# Altium PCB StatusLEDSchem.PcbDoc
Units mil, origin at the board's own origin, x right, y up, seen from the top; angles counter-clockwise.
Board outline 3375 x 1400 mil, 2 copper layers (Top Layer, Bottom Layer); 11 components, 11 nets, 39 pads, 6 vias.
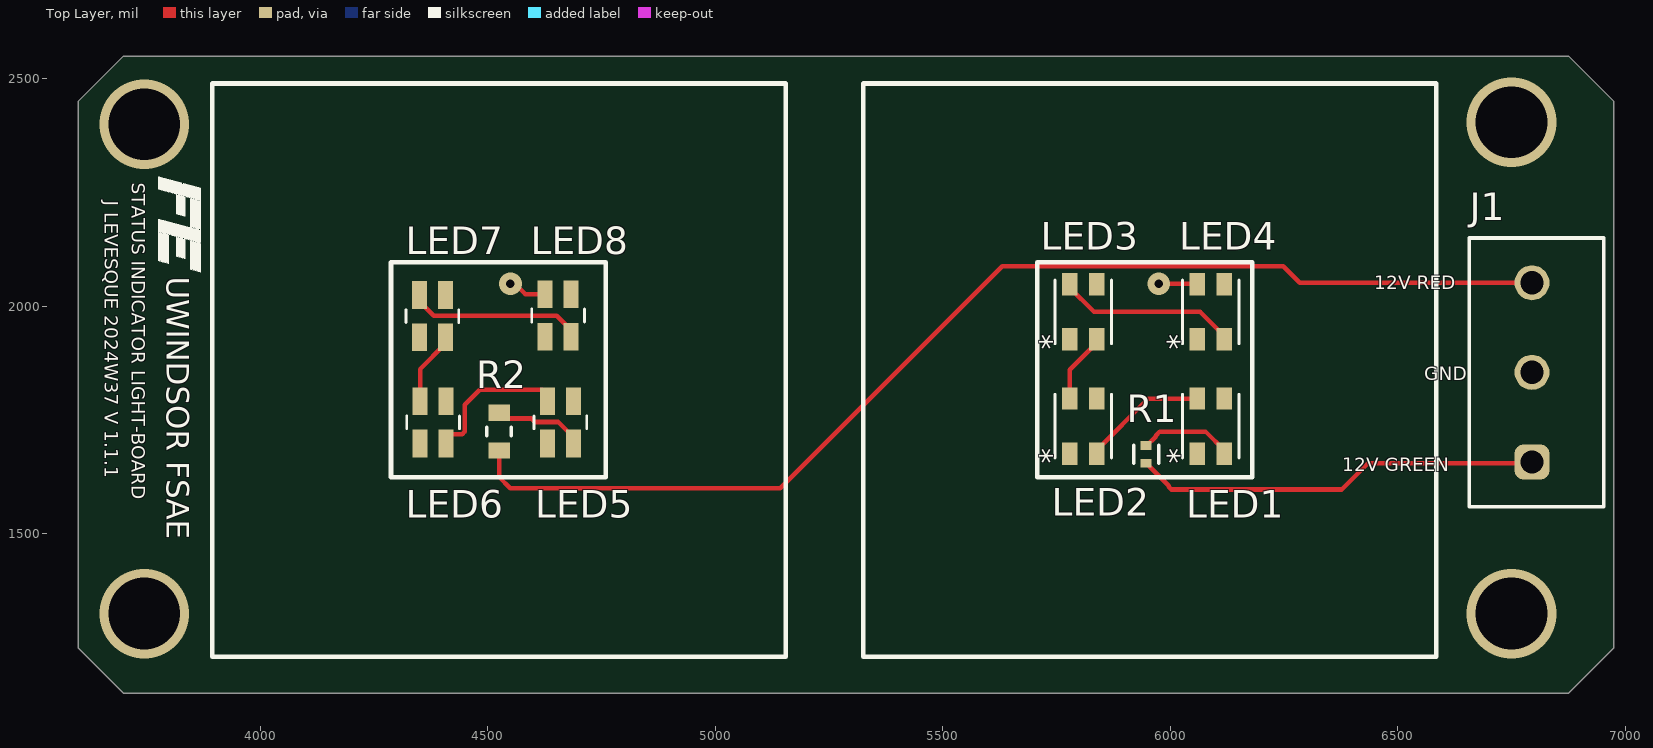
[diagram p0: Top Layer view]
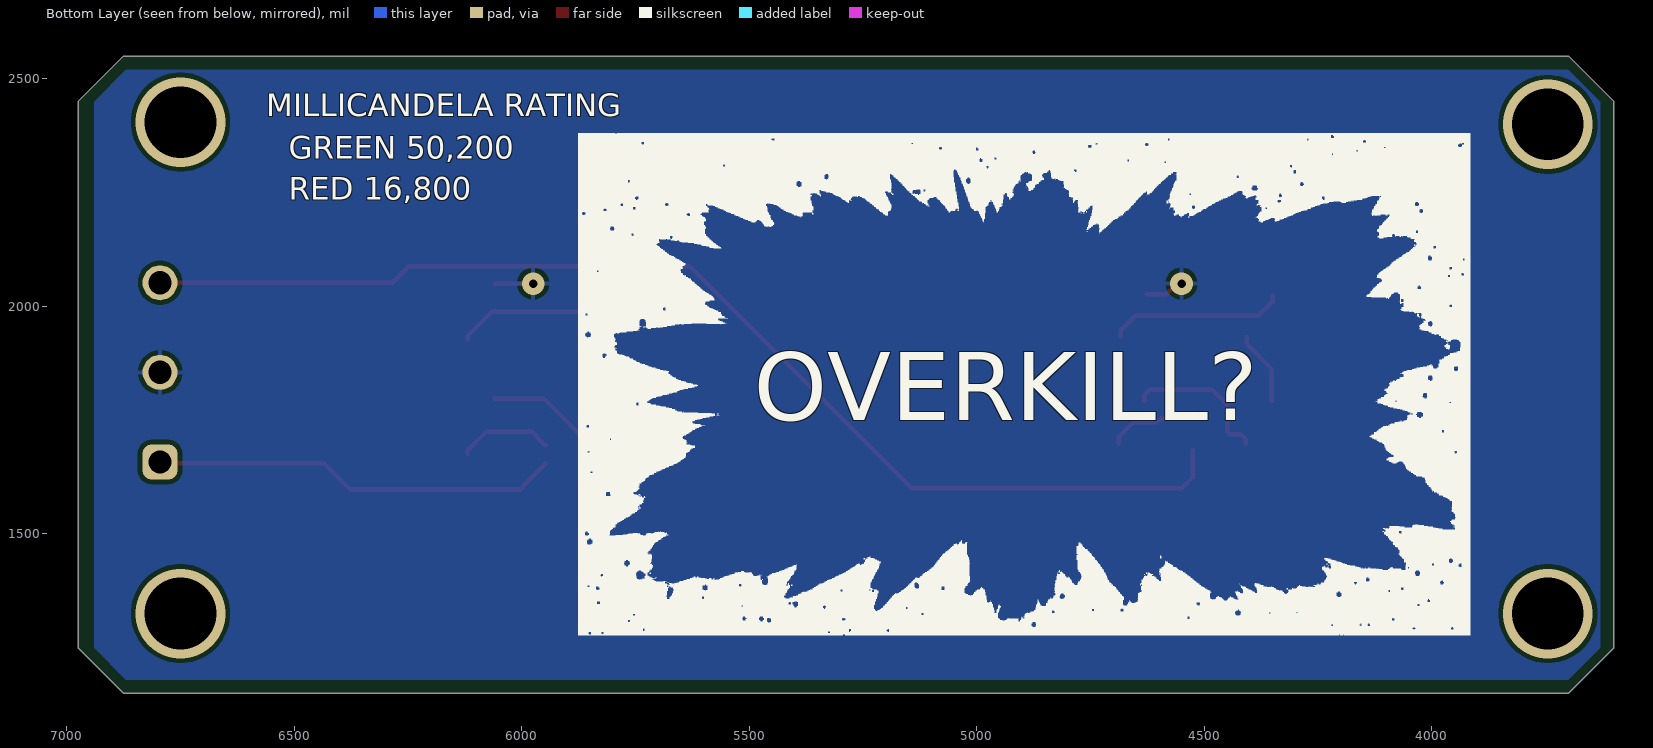
[diagram p1: Bottom Layer view, seen from below]
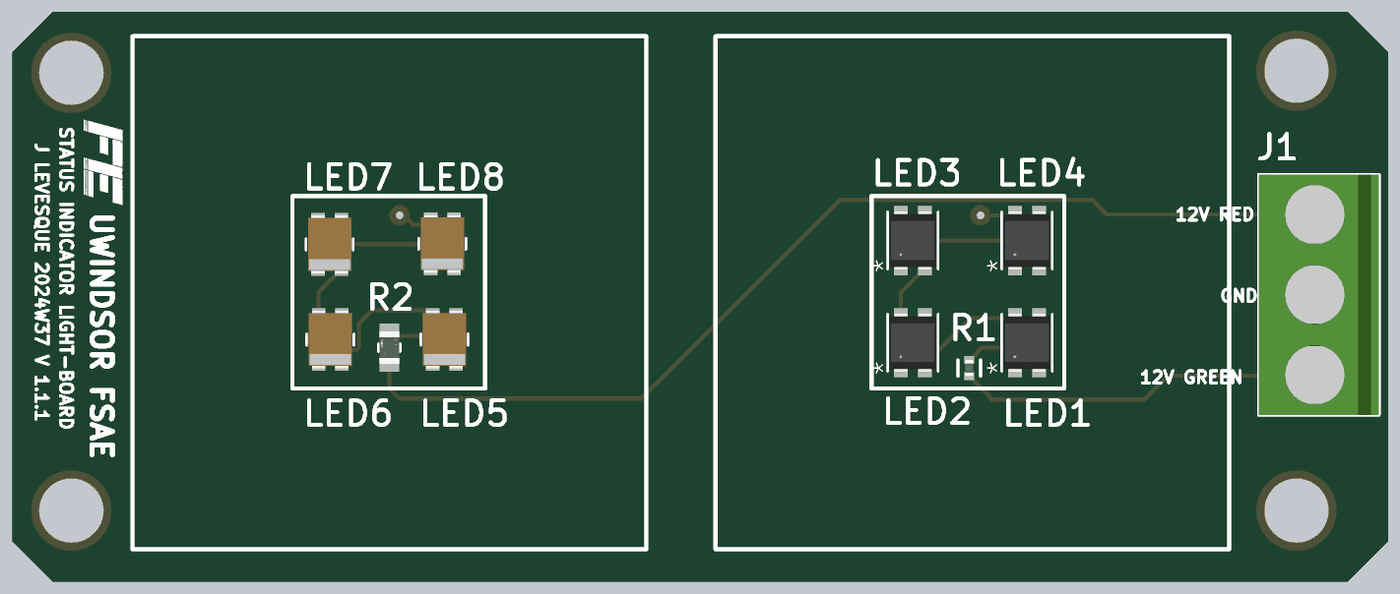
[diagram p2: 3D render of the assembled board from above, using the file's embedded part models]

## Layer stack, top to bottom
Top Solder: solder mask 0.4, Solder Resist, Dk 3.5
Top Layer: signal copper 1.4
Dielectric 1: dielectric 12.6, FR-4, Dk 4.8
Bottom Layer: signal copper 1.4
Bottom Solder: solder mask 0.4, Solder Resist, Dk 3.5

## Board outline
3600,1250 3700,1150 6875,1150 6975,1250 6975,2450 6875,2550 3700,2550 3600,2450

## Design rules (kind name [scope] priority, off if disabled: settings)
Clearance [All] p1: gap=10 ignorepadtopadclearanceinfootprint=FALSE
PolygonConnect [All] p1: connectstyle=Relief reliefconductorwidth=10 reliefentries=4 polygonreliefangle="90 Angle" airgapwidth=10
RoutingVias [All] p1: holewidth=28 width=50 viastyle="Through Hole" minholewidth=28 minwidth=50 maxholewidth=28 maxwidth=50
SolderMaskExpansion [All] p1: expansion=4 istentingtop=FALSE
SupplyNets "Schematic Supply Nets_2" [InNet('+12V GREEN')] p1: voltage=0.000
SupplyNets "Schematic Supply Nets_1" [InNet('+12V RED')] p2: voltage=0.000
SupplyNets "Schematic Supply Nets" [InNet('-12V')] p3: voltage=0.000
Width [All] p1: maxlimit=10 minlimit=10 preferedwidth=10
30 further rules are at their usual default settings.

## Classes and differential pairs
component class StatusLEDSchem: J1 LED1 LED2 LED3 LED4 LED5 LED7 LED8 R2

## Components (designator, comment, footprint, x,y, rotation, side; value= is the part's Value field where it differs from the comment)
J1 "691137710003" 691137710003 6804.84,1855 r90 top
LED1 "CLM2D-GPC-CB0E0793" PLCC4_3.5X2.8X3.45_CRW 6089,1737 r90 top
LED2 "CLM2D-GPC-CB0E0793" PLCC4_3.5X2.8X3.45_CRW 5809,1737 r90 top
LED3 "CLM2D-GPC-CB0E0793" PLCC4_3.5X2.8X3.45_CRW 5809,1988 r90 top
LED4 "CLM2D-GPC-CB0E0793" PLCC4_3.5X2.8X3.45_CRW 6089,1988 r90 top
LED5 "CLM2B-REW-CYAZ0AA3" PLCC4_CLM2B_3P2X2P7_CRE 4660,1745 r90 top
LED6 "CLM2B-REW-CYAZ0AA3" PLCC4_CLM2B_3P2X2P7_CRE 4380,1745 r90 top
LED7 "CLM2B-REW-CYAZ0AA3" PLCC4_CLM2B_3P2X2P7_CRE 4378.54,1978.5 r90 top
LED8 "CLM2B-REW-CYAZ0AA3" PLCC4_CLM2B_3P2X2P7_CRE 4655,1980 r90 top
R1 "RT0402BRD0720RL" FP-RT0402-0_35-MFG 5947.05,1675 r90 top
R2 "RT0805BRD0740R2L" FP-RT0805-MFG 4525,1725 r90 top value=40.2Ω

## Footprints (in the part's own frame and the unit in brackets; to place one, negate y for a bottom-side part, rotate by r counter-clockwise, add the part's x,y. Pads: shape width x height; smd on the part's side, far side on the other; paste and mask are expansions set on the pad)
691137710003 [mm] "Horizontal Cable Entry with Pressure Clamp, pitch 5mm, 03p"
  rrect50% 1.95x1.95 hole 1.3: 1(-5,0.25)
  round 1.95 hole 1.3: 2(0,0.25) 3(5,0.25)
  silkscreen extent -7.5,-3.75 7.5,3.75, body extent -7.5,-3.75 7.5,3.75, height 11.6
FP-RT0402-0_35-MFG [mm]
  rect 0.5x0.6 smd paste+0 mask+0: 1(-0.5,0) 2(0.5,0)
  silkscreen extent -0.5,-0.71 0.5,0.7, body extent -0.85,-0.4 0.85,0.4, height 0.25
FP-RT0805-MFG [mm]
  rect 0.9x1.2 smd paste+0 mask+0: 1(-1.05,0) 2(1.05,0)
  silkscreen extent -0.23,-0.67 0.23,0.67, body extent -1.6,-0.77 1.6,0.77, height 0.25
PLCC4_3.5X2.8X3.45_CRW [mil]
  rect 49x34 smd paste+0 mask+0: 1(-60.5,29.53) 2(-60.5,-29.53) 3(60.5,-29.53) 4(60.5,29.53)
  silkscreen extent -70,-62 70,62, body extent -71,-57 71,57, height 144
PLCC4_CLM2B_3P2X2P7_CRE [mil]
  rect 61x33 smd paste+0 mask+0: 1(-46.5,28.54) 2(-46.5,-28.54) 3(46.5,-28.54) 4(46.5,28.54)
  silkscreen extent -14,-58 14,58, body extent -71,-53 71,53, height 146

## Part data
J1: library part CMP-1502-03325-2, Lead Pitch=5mm, NexarPartId=78871138, Number of Pins=3, Packaging=Box, RoHS=Non-Compliant
LED1 LED2 LED3 LED4 LED5 LED6 LED7 LED8: "No Description Available", Mfr_Name=Wolfspeed, RefDes=RefDes, Type=Type
R1: library part CMP-2002-02937-3, "RES SMD 20 OHM 0.1% 1/16W 0402", Case Code (Imperial)=0402, Case Code (Metric)=1005, Max Operating Temperature=125°C, Max Power Dissipation=63mW, Min Operating Temperature=-55°C, Package Quantity=10000, Power Rating=62.5mW, Resistance=20R, Resistor Type="Thin Film", Temperature Coefficient=25ppm/°C, Tolerance=0.1%, Voltage Rating=50V, Case/Package=0402, Height=0.014inch, Lead Free="Lead Free", Length=0.039inch, Number of Terminations=2, Packaging="Tape and Reel", RoHS Compliant=Yes, Series=RT, Size Code=0402, Termination=SMD/SMT, Voltage Rating (DC)=50V, Weight=2.3E-05oz, Width=0.02inch
R2: library part CMP-03412-036233-1, "RES SMD 40.2 OHM 0.1% 1/8W 0805", Manufacturer=Yageo, Package=RT0805, Power Rating=0.125W, Resistance=40.2Ω, Temperature="-55°C to +155°C", Temperature Coefficient="25 ppm/°C", Temperature Range High=+155°C, Temperature Range Low=-55°C, Tolerance=0.0025, Voltage Rating=150V, Automotive=No, Category=Res, ComponentLink2Description=Datasheet, ComponentLink2URL=http://www.yageo.com/documents/recent/PYu-RT_1-to-0.01_RoHS_L_9.pdf, Composition="Thin Film", Device Class L1="Passive Components", Device Class L2=Resistors, Device Class L3="Chip SMD Resistors", Digikey Description="RES SMD 40.2 OHM 0.1% 1/8W 0805", Footprint Url=http://www.yageo.com/exep/pages/download/literatures/PYu-R_Mount_10.pdf, Height=0.6mm, Ipc Land Pattern Name=RESC200125X50, Lead Free=Yes, Manufacturer Part Number=RT0805BRD0740R2L, Mouser Description="Thin Film Resistors - SMD 1/8W 40.2 ohm .1% 25ppm", Octopart=https://octopart.com/rt0805brd0740r2l-yageo-1269193, RoHS=TRUE, Series=RT

## Via types
v1: diameter 196.85, hole 157.48, Top Layer to Bottom Layer, tented both sides, 4 vias
v2: diameter 50, hole 19, Top Layer to Bottom Layer, tented both sides, 2 vias

## Nets (pads, with @x,y where several pads share a name; then routed paths per layer and width w, separated by ;. In a path a pad name is that pad's centre, name@x,y a point inside that pad or via, vN(x,y) a via of type N, cw(c..) or ccw(c..) an arc to the next point about the centre after c; other vN are vias at no path point)
"+12V GREEN": J1.1 R1.1 | length 898.3
  Top Layer w10: R1.1 5996.5,1605.86 5996.5,1603.5 6002.36,1597.64 6376.73,1597.64 6434.88,1655.79 6792.64,1655.79 J1.1
"+12V RED": J1.3 R2.1 | length 2556.1
  Top Layer w10: R2.1 4525,1625 4550,1600 5142.76,1600 5630.76,2088 6248.52,2088 6284.67,2051.85 J1.3
-12V: J1.2 LED4.4 LED8.4 | length 171.3
  Top Layer w10: v2(4550,2050) 4559.57,2050 4583.07,2026.5 LED8.4 ; v2(5975,2050) 6057.97,2050 LED4.4
NetLED1_2: LED1.2 R1.2 | length 209.7
  Top Layer w10: R1.2 5949.02,1694.68 5968,1713.67 5968,1715.64 5977.36,1725 6077.53,1725 6118.53,1684 LED1.2
NetLED1_4: LED1.4 LED2.2 | length 275.5
  Top Layer w10: LED2.2 5838.53,1684 5952.03,1797.5 LED1.4
NetLED2_4: LED2.4 LED3.2 | length 154.5
  Top Layer w10: LED2.4 5779.47,1860.94 5838.53,1920 LED3.2
NetLED3_4: LED3.4 LED4.2 | length 398
  Top Layer w10: LED3.4 5779.47,2041 5832.47,1988 6065.53,1988 6118.53,1935 LED4.2
NetLED5_2: LED5.2 R2.2 | length 199.8
  Top Layer w10: R2.2 4537.72,1753.62 4595.52,1753.62 4603.14,1746 4655.04,1746 4688.54,1712.5 LED5.2
NetLED5_4: LED5.4 LED6.2 | length 330.7
  Top Layer w10: LED6.2 4408.54,1707.64 4420.04,1719.14 4444.14,1719.14 4450,1725 4450,1784 4483,1817 4619.96,1817 4631.46,1805.5 LED5.4
NetLED6_4: LED6.4 LED7.2 | length 163.5
  Top Layer w10: LED6.4 4351.46,1862.37 4407.09,1918 LED7.2
NetLED7_4: LED7.4 LED8.2 | length 387.8
  Top Layer w10: LED7.4 4350,2011 4381.75,1979.25 4651.79,1979.25 4683.54,1947.5 LED8.2
pads on no net: LED1.1 LED1.3 LED2.1 LED2.3 LED3.1 LED3.3 LED4.1 LED4.3 LED5.1 LED5.3 LED6.1 LED6.3 LED7.1 LED7.3 LED8.1 LED8.3
copper on no net:
  other v1: 3745,1325 6750,1325 3745,2400 6750,2405

## Polygon pours and split planes (outlines as drawn)
-12V on Bottom Layer "-12V_L02_P000" (solid, pour order 0): 3700,2520 3630,2450 3630,1250 3700,1180 6870,1180 6940,1250 6940,2450 6870,2520

## Silkscreen, mask and mechanical layers (free items; w line width, h text height)
Top Overlay:
  drawing of 35 lines, arcs and shapes, not listed
  text "STATUS INDICATOR LIGHT-BOARD" at 3718,2272 h30 r270
  text "J LEVESQUE 2024W37 V 1.1.1" at 3658,2232 h30 r270
  text "UWINDSOR FSAE" at 3795,2065 h50 r270
  text "12V RED" at 6448,2038 h30
  text "GND" at 6558,1838 h30
  text "12V GREEN" at 6378,1638 h30
Bottom Overlay:
  drawing of 37 lines, arcs and shapes, not listed
  text "MILLICANDELA RATING" at 6562,2418 h50
  text "GREEN 50,200" at 6512,2324.66 h50
  text "RED 16,800" at 6512,2234.66 h50
  text "OVERKILL?" at 5490,1750 h150
Top Assembly:
  the board outline again, w7.87

## Text inside footprints (layer, text, board x,y; h text height)
LED1: Top Overlay "*" at 6042.47,1654 h50 r90; Top 3D Body "*" at 6075.47,1684 h50 r90
LED2: Top Overlay "*" at 5762.47,1654 h50 r90; Top 3D Body "*" at 5795.47,1684 h50 r90
LED3: Top Overlay "*" at 5762.47,1905 h50 r90; Top 3D Body "*" at 5795.47,1935 h50 r90
LED4: Top Overlay "*" at 6042.47,1905 h50 r90; Top 3D Body "*" at 6075.47,1935 h50 r90